# Altium PCB sst_v3.PcbDoc
Units mm, origin at the board's own origin, x right, y up, seen from the top; angles counter-clockwise.
Board outline 75 x 75.5 mm, 2 copper layers (F.Cu, B.Cu); 35 components, 36 nets, 147 pads, 11 vias.
Unrouted connection lines stored in the file: 1.
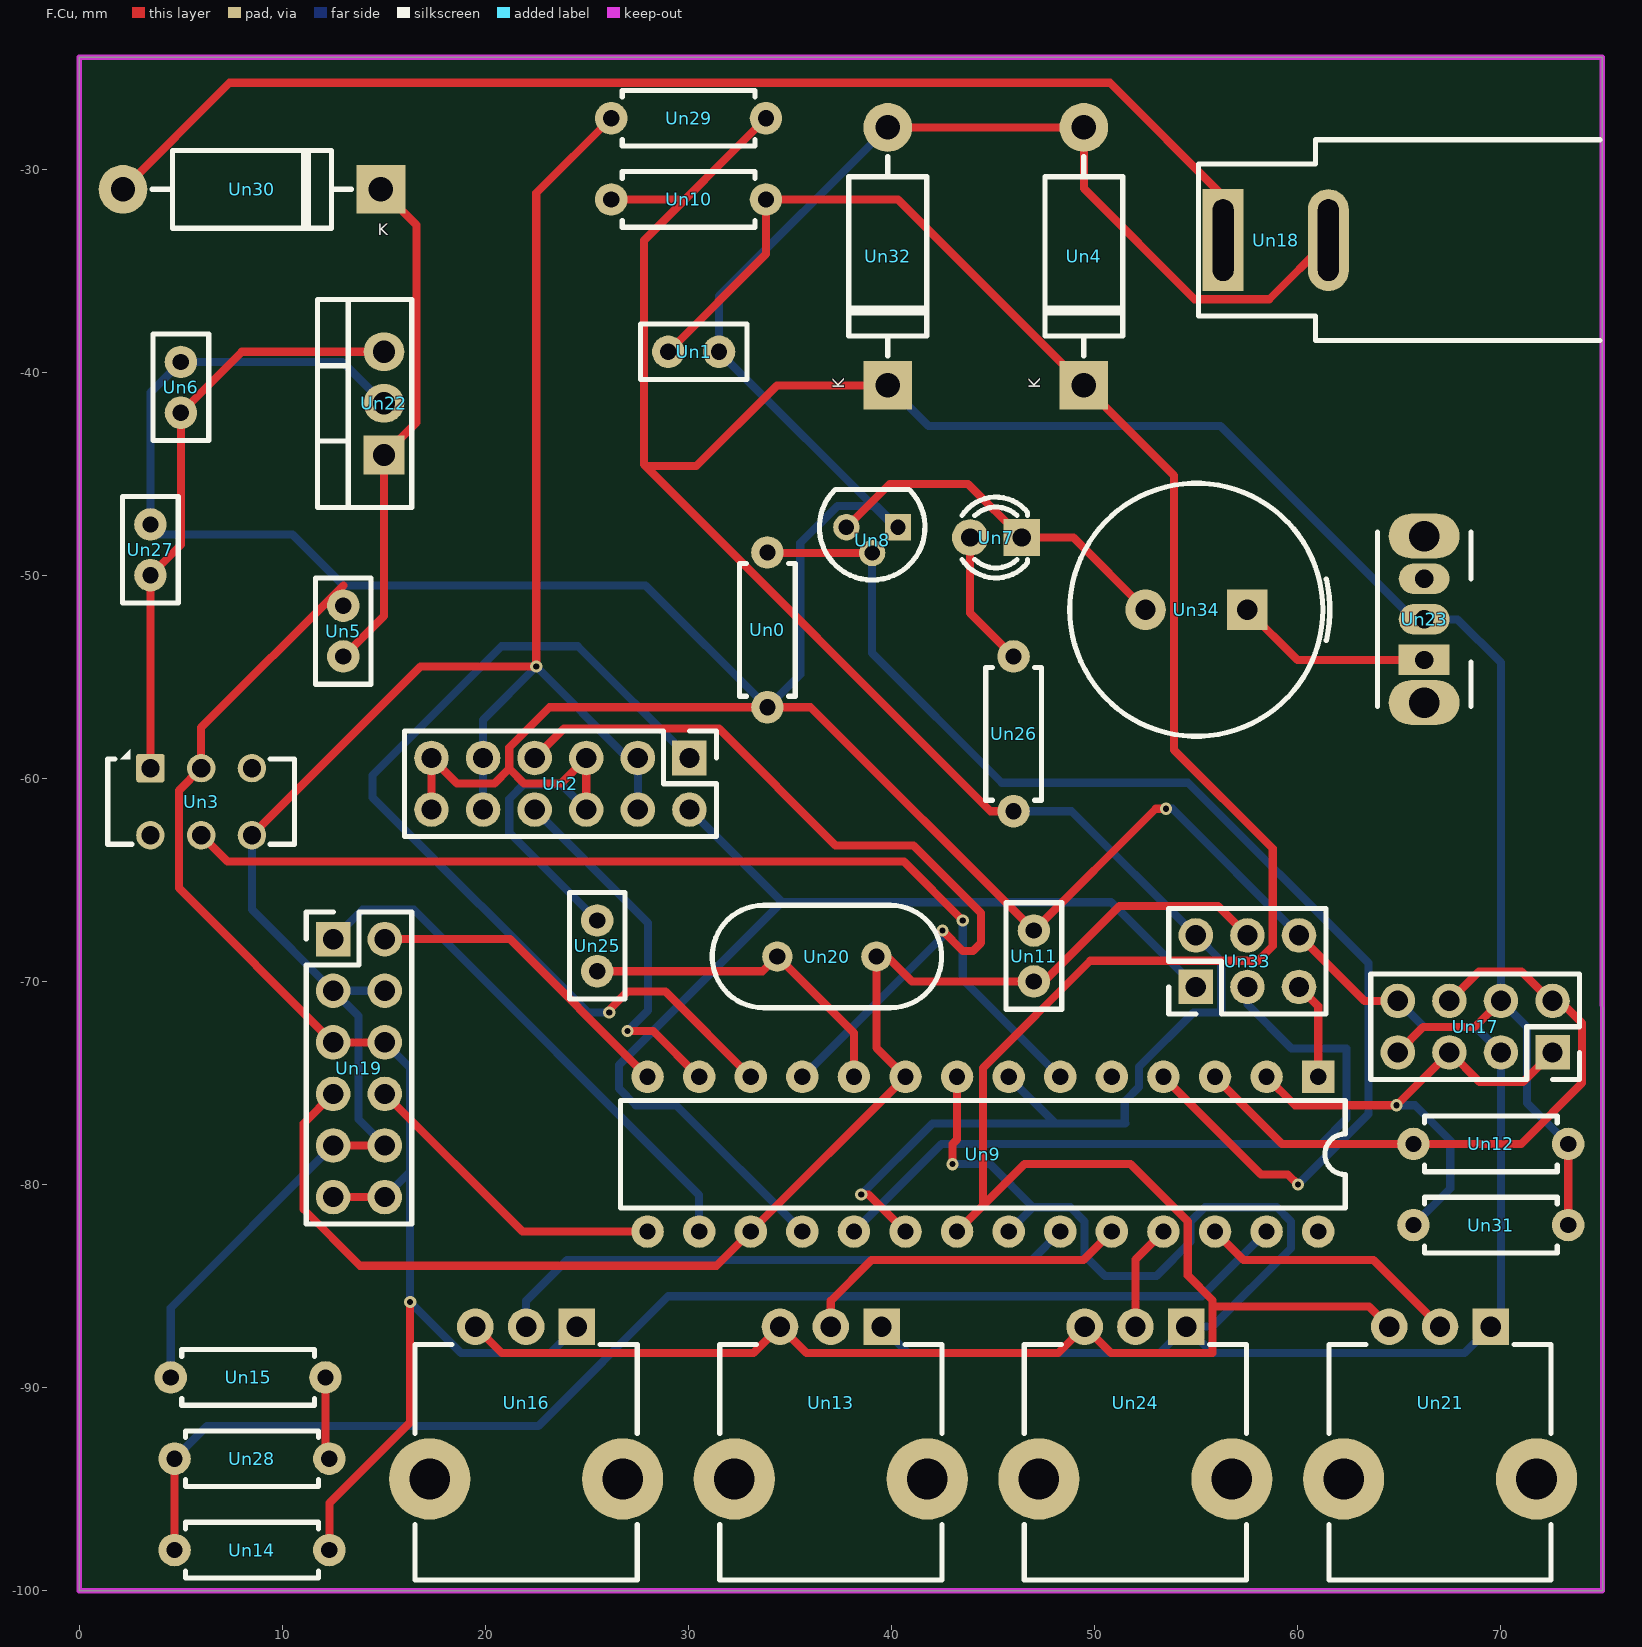
[diagram p0: F.Cu view]
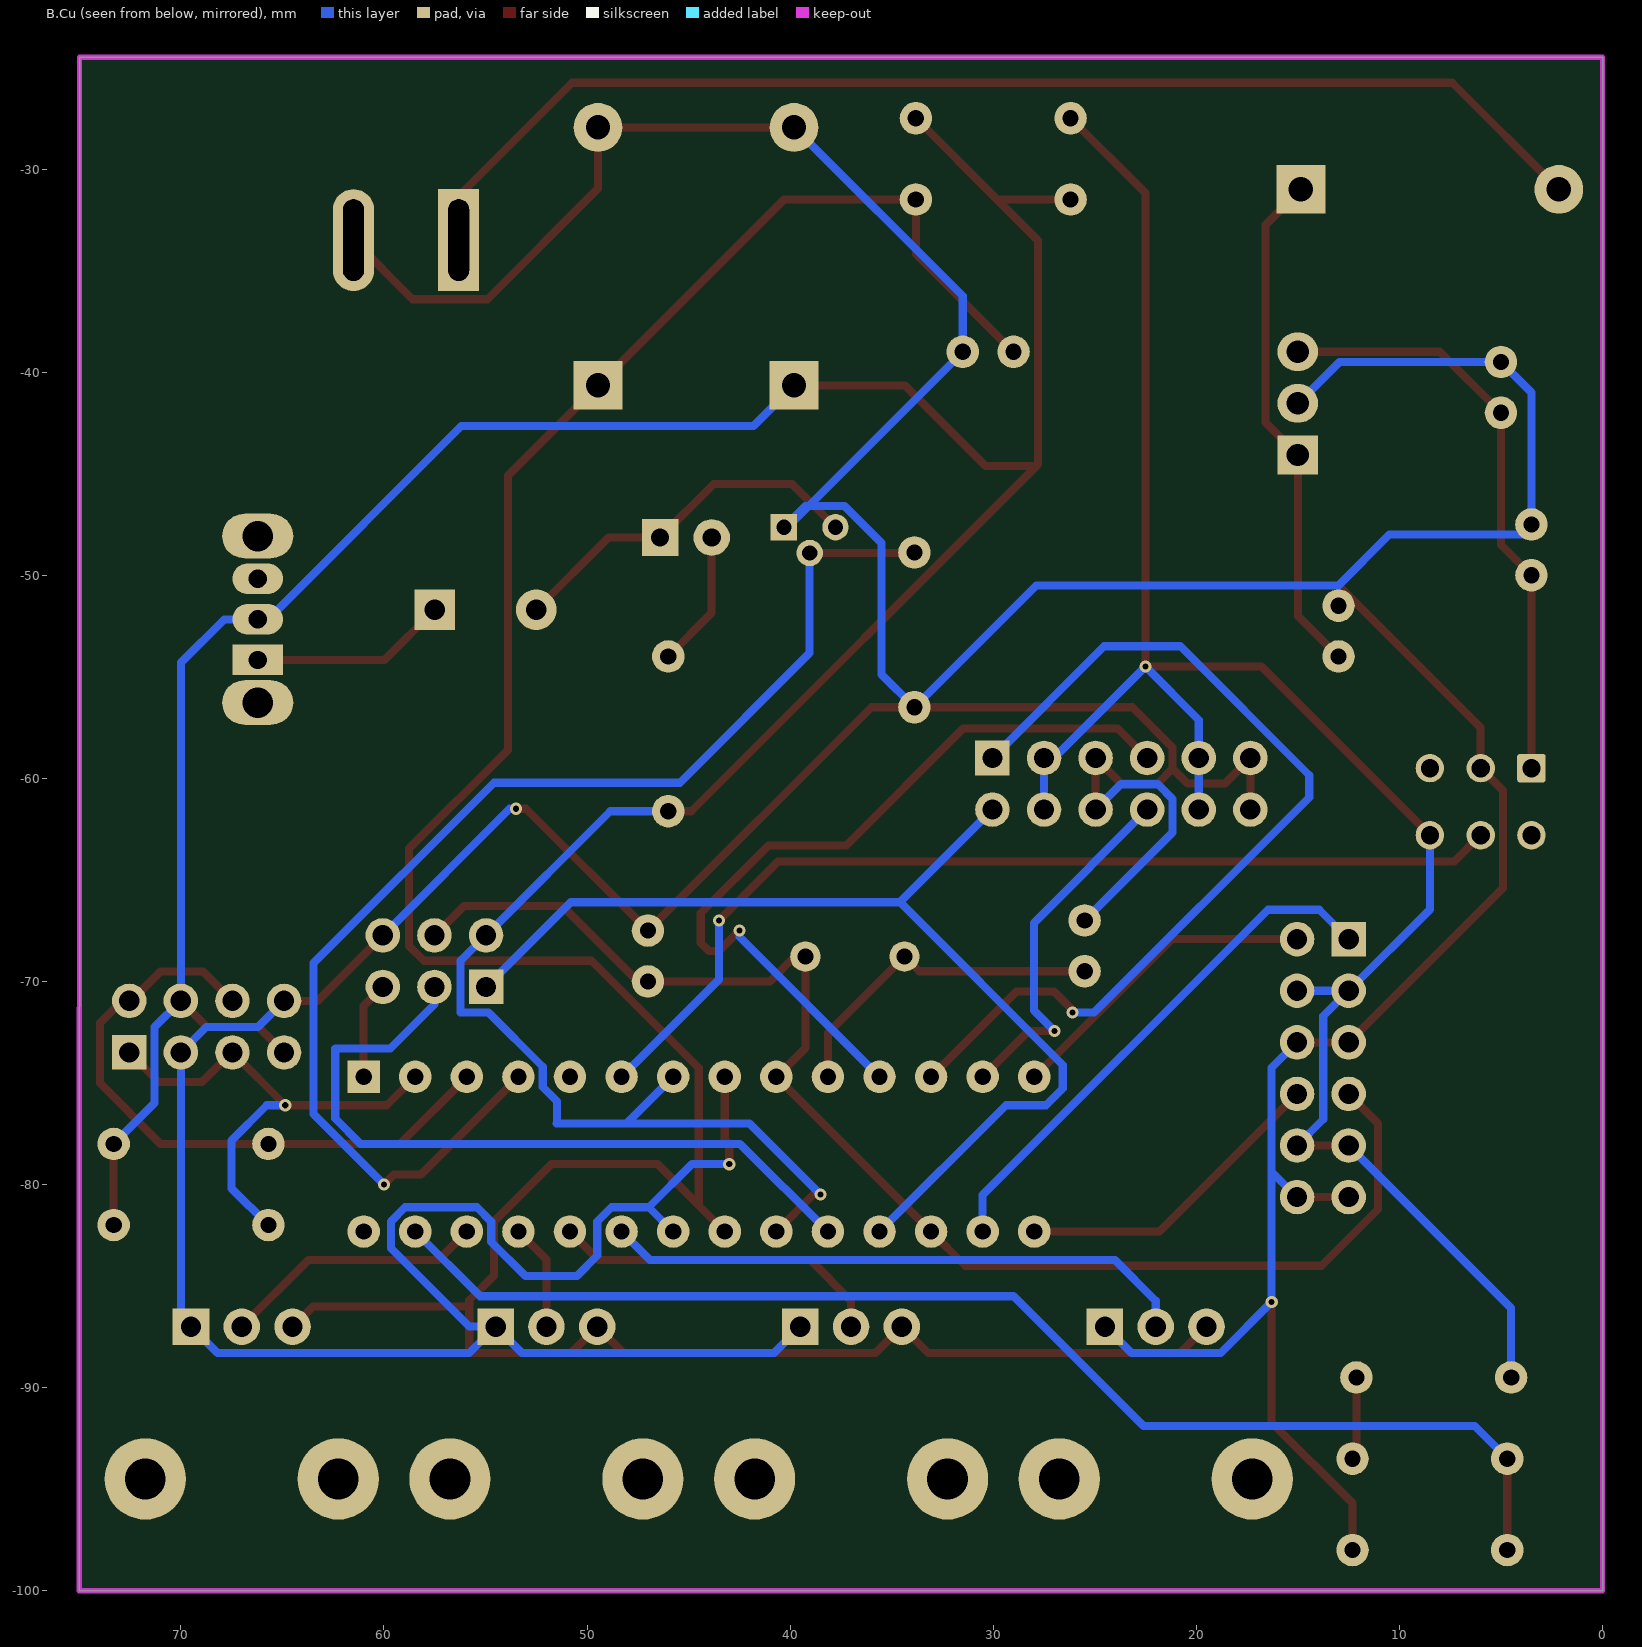
[diagram p1: B.Cu view, seen from below]

## Layer stack, top to bottom
F.Mask: solder mask 0.0102, Solder Resist, Dk 3.5
F.Cu: signal copper 0.0356
Dielectric 1: dielectric 0.32, FR-4, Dk 4.8
B.Cu: signal copper 0.0356
B.Mask: solder mask 0.0102, Solder Resist, Dk 3.5

## Board outline
74.99,-42.5 74.99,-24.5 0,-24.5 0,-99.5 0,-100 75,-100 74.99,-42.5

## Design rules (kind name [scope] priority, off if disabled: settings)
Clearance [All] p1: gap=0.254 ignorepadtopadclearanceinfootprint=FALSE
MinimumSolderMaskSliver [All] p1: minsoldermaskwidth=0
PolygonConnect [All] p1: connectstyle=Direct reliefconductorwidth=0.254 reliefentries=4 polygonreliefangle="90 Angle" airgapwidth=0.254
RoutingVias [All] p1: holewidth=0.711 width=1.27 viastyle="Through Hole" minholewidth=0.711 minwidth=1.27 maxholewidth=0.711 maxwidth=1.27
SilkToSilkClearance [All] p1: silktosilkclearance=0
SilkToSolderMaskClearance [IsPad] p1: minsilkscreentomaskgap=0 clearancetoexposedcopper=TRUE
SolderMaskExpansion [All] p1: expansion=0.102 istentingtop=FALSE
Width [All] p1: maxlimit=10 minlimit=0.254 preferedwidth=0.254 minimp=50.000000 maximp=50.000000 favimp=50.000000
27 further rules are at their usual default settings.

## Components (designator, comment, footprint, x,y, rotation, side; value= is the part's Value field where it differs from the comment)
Un0 "Comment" R_Axial_DIN0207_L6.3mm_D2.5mm_P7.62mm_Horizontal 33.88,-48.88 r270 top value=R
Un1 "Comment" C_Disc_D5.0mm_W2.5mm_P2.50mm 29,-39 r0 top value=C
Un2 "Comment" PinHeader_2x06_P2.54mm_Vertical 30.04,-59 r270 top value=CONN_12
Un3 "Comment" SW_CK_JS202011CQN_DPDT_Straight 3.5,-59.5 r0 top value=~
Un4 "Comment" D_DO-15_P12.70mm_Horizontal 49.46,-40.65 r90 top value=VD
Un5 "Comment" C_Disc_D5.0mm_W2.5mm_P2.50mm 13,-54 r90 top value=C
Un6 "Comment" C_Disc_D5.0mm_W2.5mm_P2.50mm 5,-42 r90 top value=C
Un7 "Comment" LED_D3.0mm 46.404,-48.144 r180 top value=HL_LED
Un8 "Comment" TO-92 40.308,-47.636 r180 top value=2П7240
Un9 "Comment" DIP-28_W7.62mm 61,-74.7 r270 top value=ATmega328-P
Un10 "Comment" R_Axial_DIN0207_L6.3mm_D2.5mm_P7.62mm_Horizontal 26.19,-31.5 r0 top value=R
Un11 "Comment" C_Disc_D5.0mm_W2.5mm_P2.50mm 47,-67.5 r270 top value=C
Un12 "Comment" R_Axial_DIN0207_L6.3mm_D2.5mm_P7.62mm_Horizontal 65.69,-78 r0 top value=R
Un13 "Comment" Potentiometer_TT_P0915N 39.5,-87 r180 top value=R_POT
Un14 "Comment" R_Axial_DIN0207_L6.3mm_D2.5mm_P7.62mm_Horizontal 4.69,-98 r0 top value=R
Un15 "Comment" R_Axial_DIN0207_L6.3mm_D2.5mm_P7.62mm_Horizontal 12.12,-89.5 r180 top value=R
Un16 "Comment" Potentiometer_TT_P0915N 24.5,-87 r180 top value=R_POT
Un17 "Comment" PinSocket_2x04_P2.54mm_Vertical 72.54,-73.5 r270 top value=CONN_8
Un18 "Comment" BarrelJack_SwitchcraftConxall_RAPC10U_Horizontal 56.32,-33.5 r180 top value=CONN_2
Un19 "Comment" PinHeader_2x06_P2.54mm_Vertical 12.5,-67.92 r0 top value=CONN_12
Un20 "Comment" Crystal_HC49-U_Vertical 39.25,-68.775 r180 top value=ZQ_CRYSTAL
Un21 "Comment" Potentiometer_TT_P0915N 69.5,-87 r180 top value=R_POT
Un22 "Comment" TO-220-3_Vertical 15,-44.08 r90 top value=LM7805_TO220
Un23 "Comment" SW_Slide_SPDT_Angled_CK_OS102011MA1Q 66.216,-54.172 r90 top value=SA_SPDT
Un24 "Comment" Potentiometer_TT_P0915N 54.5,-87 r180 top value=R_POT
Un25 "Comment" C_Disc_D5.0mm_W2.5mm_P2.50mm 25.5,-67 r270 top value=C
Un26 "Comment" R_Axial_DIN0207_L6.3mm_D2.5mm_P7.62mm_Horizontal 46,-54 r270 top value=R
Un27 "Comment" C_Disc_D5.0mm_W2.5mm_P2.50mm 3.5,-50 r90 top value=C
Un28 "Comment" R_Axial_DIN0207_L6.3mm_D2.5mm_P7.62mm_Horizontal 4.69,-93.5 r0 top value=R
Un29 "Comment" R_Axial_DIN0207_L6.3mm_D2.5mm_P7.62mm_Horizontal 26.19,-27.5 r0 top value=R
Un30 "Comment" D_DO-15_P12.70mm_Horizontal 14.85,-31 r180 top value=VD_Schottky
Un31 "Comment" R_Axial_DIN0207_L6.3mm_D2.5mm_P7.62mm_Horizontal 65.69,-82 r0 top value=R
Un32 "Comment" D_DO-15_P12.70mm_Horizontal 39.808,-40.65 r90 top value=VD
Un33 "Comment" PinHeader_2x03_P2.54mm_Vertical 54.975,-70.275 r90 top value=CONN_6
Un34 "Comment" Buzzer_TDK_PS1240P02BT_D12.2mm_H6.5mm 57.5,-51.7 r180 top value=Buzzer

## Footprints (in the part's own frame and the unit in brackets; to place one, negate y for a bottom-side part, rotate by r counter-clockwise, add the part's x,y. Pads: shape width x height; smd on the part's side, far side on the other; paste and mask are expansions set on the pad)
BarrelJack_SwitchcraftConxall_RAPC10U_Horizontal [mm]
  rect 2.02x5.02 hole 4.02 slot 1.02 at 0 deg paste-2539.97 mask+0: 1(0,0)
  rrect100% 2.02x5.02 hole 4.02 slot 1.02 at 0 deg paste-2539.97 mask+0: 2(-5.18,0)
  silkscreen extent -18.55,-4.94 1.22,4.94
Buzzer_TDK_PS1240P02BT_D12.2mm_H6.5mm [mm]
  rect 2x2 hole 1 paste-2539.97 mask+0: 1(0,0)
  round 2 hole 1 paste-2539.97 mask+0: 2(5,0)
  silkscreen extent -4.07,-6.23 8.73,6.23
C_Disc_D5.0mm_W2.5mm_P2.50mm [mm]
  round 1.6 hole 0.8 paste-2539.97 mask+0: 1(0,0) 2(2.5,0)
  silkscreen extent -1.37,-1.37 3.87,1.37
Crystal_HC49-U_Vertical [mm]
  round 1.5 hole 0.8 paste-2539.97 mask+0: 1(0,0) 2(4.88,0)
  silkscreen extent -3.21,-2.52 8.09,2.52
D_DO-15_P12.70mm_Horizontal [mm]
  rect 2.4x2.4 hole 1.2 paste-2539.97 mask+0: 1(0,0)
  rrect100% 2.4x2.4 hole 1.2 paste-2539.97 mask+0: 2(12.7,0)
  silkscreen extent 1.44,-1.92 11.26,1.92
DIP-28_W7.62mm [mm]
  rect 1.6x1.6 hole 0.8 paste-2539.97 mask+0: 1(0,0)
  rrect100% 1.6x1.6 hole 0.8 paste-2539.97 mask+0: 2(0,-2.54) 3(0,-5.08) 4(0,-7.62) 5(0,-10.16) 6(0,-12.7) 7(0,-15.24) 8(0,-17.78) 9(0,-20.32) 10(0,-22.86) 11(0,-25.4) 12(0,-27.94) 13(0,-30.48) 14(0,-33.02) 15(7.62,-33.02) 16(7.62,-30.48) 17(7.62,-27.94) 18(7.62,-25.4) 19(7.62,-22.86) 20(7.62,-20.32) 21(7.62,-17.78) 22(7.62,-15.24) 23(7.62,-12.7) 24(7.62,-10.16) 25(7.62,-7.62) 26(7.62,-5.08) 27(7.62,-2.54) 28(7.62,0)
  silkscreen extent 1.16,-34.35 6.46,1.33
LED_D3.0mm [mm]
  rect 1.8x1.8 hole 0.9 paste-2539.97 mask+0: 1(0,0)
  round 1.8 hole 0.9 paste-2539.97 mask+0: 2(2.54,0)
  silkscreen extent -0.29,-1.99 2.94,1.99
PinHeader_2x03_P2.54mm_Vertical [mm]
  rect 1.7x1.7 hole 1 paste-2539.97 mask+0: 1(0,0)
  rrect100% 1.7x1.7 hole 1 paste-2539.97 mask+0: 2(2.54,0) 3(0,-2.54) 4(2.54,-2.54) 5(0,-5.08) 6(2.54,-5.08)
  silkscreen extent -1.33,-6.41 3.87,1.33
PinHeader_2x06_P2.54mm_Vertical [mm]
  rect 1.7x1.7 hole 1 paste-2539.97 mask+0: 1(0,0)
  rrect100% 1.7x1.7 hole 1 paste-2539.97 mask+0: 2(2.54,0) 3(0,-2.54) 4(2.54,-2.54) 5(0,-5.08) 6(2.54,-5.08) 7(0,-7.62) 8(2.54,-7.62) 9(0,-10.16) 10(2.54,-10.16) 11(0,-12.7) 12(2.54,-12.7)
  silkscreen extent -1.33,-14.03 3.87,1.33
PinSocket_2x04_P2.54mm_Vertical [mm]
  rect 1.7x1.7 hole 1 paste-2539.97 mask+0: 1(0,0)
  rrect100% 1.7x1.7 hole 1 paste-2539.97 mask+0: 2(-2.54,0) 3(0,-2.54) 4(-2.54,-2.54) 5(0,-5.08) 6(-2.54,-5.08) 7(0,-7.62) 8(-2.54,-7.62)
  silkscreen extent -3.87,-8.95 1.33,1.33
Potentiometer_TT_P0915N [mm]
  rect 1.8x1.8 hole 1 paste-2539.97 mask+0: 1(0,0)
  round 1.8 hole 1 paste-2539.97 mask+0: 2(2.5,0) 3(5,0)
  rrect100% 4x4 hole 2 paste-2539.97 mask+0: Un1(-2.25,7.5) Un2(7.25,7.5)
  silkscreen extent -2.97,0.88 7.97,12.47
R_Axial_DIN0207_L6.3mm_D2.5mm_P7.62mm_Horizontal [mm]
  round 1.6 hole 0.8 paste-2539.97 mask+0: 1(0,0)
  rrect100% 1.6x1.6 hole 0.8 paste-2539.97 mask+0: 2(7.62,0)
  silkscreen extent 0.54,-1.37 7.08,1.37
SW_CK_JS202011CQN_DPDT_Straight [mm]
  rrect18% 1.4x1.4 hole 0.9 paste-2539.97 mask+0: 1(0,0)
  round 1.4 hole 0.9 paste-2539.97 mask+0: 2(2.5,0) 3(5,0) 4(5,-3.3) 5(2.5,-3.3) 6(0,-3.3)
  silkscreen extent -2.1,-3.75 7.1,0.93
SW_Slide_SPDT_Angled_CK_OS102011MA1Q [mm]
  rect 1.5x2.5 hole 0.9 paste-2539.97 mask+0: 1(0,0)
  rrect100% 1.5x2.5 hole 0.9 paste-2539.97 mask+0: 2(2,0) 3(4,0)
  rrect100% 2.2x3.5 hole 1.5 paste-2539.97 mask+0: Un1(-2.1,0) Un2(6.1,0)
  silkscreen extent -2.3,-2.3 6.3,2.3
TO-92 [mm]
  rect 1.3x1.3 hole 0.75 paste-2539.97 mask+0: 1(0,0)
  round 1.3 hole 0.75 paste-2539.97 mask+0: 2(1.27,1.27) 3(2.54,0)
  silkscreen extent -1.33,-1.85 3.87,2.6
TO-220-3_Vertical [mm]
  rect 1.905x2 hole 1.1 paste-2539.97 mask+0: 1(0,0)
  rrect100% 1.905x2 hole 1.1 paste-2539.97 mask+0: 2(2.54,0) 3(5.08,0)
  silkscreen extent -2.58,-1.37 7.66,3.27

## Part data
Un0 Un10 Un12 Un14 Un15 Un26 Un28 Un29 Un31: library part R_Axial_DIN0207_L6.3mm_D2.5mm_P7.62mm_Horizontal, "Resistor, Axial_DIN0207 series, Axial, Horizontal, pin pitch=7.62mm, 0.25W = 1/4W, length*diameter=6.3*2.5mm^2, http://cdn-reichelt.de/documents/datenblatt/B400/1_4W%23YAG.pdf", Footprint=Resistor_THT:R_Axial_DIN0207_L6.3mm_D2.5mm_P7.62mm_Horizontal, ki_fp_filters=Resistor_*:*
  Un0: Reference=R13
  Un10: Reference=R2
  Un12: Reference=R4
  Un14: Reference=R11, Description=10кОм
  Un15: Reference=R9, Description=10кОм
  Un26: Reference=R12
  Un28: Reference=R10, Description=10кОм
  Un29: Reference=R1
  Un31: Reference=R3
Un1 Un5 Un6 Un11 Un25 Un27: library part C_Disc_D5.0mm_W2.5mm_P2.50mm, "C, Disc series, Radial, pin pitch=2.50mm, , diameter*width=5*2.5mm^2, Capacitor, http://cdn-reichelt.de/documents/datenblatt/B300/DS_KERKO_TC.pdf"
  Un1: Reference=C1, Footprint=Capacitor_THT:CP_Radial_D8.0mm_P2.50mm
  Un5: Reference=C2, Footprint=Capacitor_THT:CP_Radial_D8.0mm_P3.50mm
  Un6: Reference=C4, Footprint=Capacitor_THT:CP_Radial_D8.0mm_P2.50mm
  Un11: Reference=C5, Footprint=Capacitor_THT:C_Radial_D6.3mm_H5.0mm_P2.50mm, Description=22пФ
  Un25: Reference=C6, Footprint=Capacitor_THT:C_Radial_D6.3mm_H5.0mm_P2.50mm, Description=22пФ
  Un27: Reference=C3, Footprint=Capacitor_THT:CP_Radial_D5.0mm_P2.00mm
Un2 Un19: library part PinHeader_2x06_P2.54mm_Vertical, "Through hole straight pin header, 2x06, 2.54mm pitch, double rows", Footprint=Connector_PinHeader_2.54mm:PinHeader_2x06_P2.54mm_Vertical, Description=1, PIN2=2, PIN3=3, PIN4=4, PIN5=5, PIN6=6, PIN7=7, PIN8=8, PIN9=9, PIN10=10, PIN11=11, PIN12=12, ki_fp_filters=Connector*:*
  Un2: Reference=XS2
  Un19: Reference=XS5
Un3: library part SW_CK_JS202011CQN_DPDT_Straight, "C&K sub miniature slide switch, JS series, DPDT, right angle, http://www.ckswitches.com/media/1422/js.pdf", Reference=SA1, Footprint=Button_Switch_THT:SW_CK_JS202011CQN_DPDT_Straight
Un4 Un30 Un32: library part D_DO-15_P12.70mm_Horizontal, "Diode, DO-15 series, Axial, Horizontal, pin pitch=12.7mm, , length*diameter=7.6*3.6mm^2, , http://www.diodes.com/_files/packages/DO-15.pdf", Footprint=Diode_THT:D_5KPW_P12.70mm_Horizontal
  Un4: Reference=VD1
  Un30: Reference=VD3
  Un32: Reference=VD2
Un7: library part LED_D3.0mm, "LED, diameter 3.0mm, 2 pins", Reference=HL1, Footprint=LED_THT:LED_D3.0mm, ki_fp_filters=LED_*:*
Un8: library part TO-92, "TO-92 leads molded, narrow, drill 0.75mm (see NXP sot054_po.pdf)", Reference=VT1, Footprint=Package_TO_SOT_THT:TO-92, Datasheet=http://www.vzpp-s.ru/production/catalog.pdf, Description=2NMOS
Un9: library part DIP-28_W7.62mm, "28-lead though-hole mounted DIP package, row spacing 7.62 mm (300 mils)", Reference=DD1, Footprint=Package_DIP:DIP-28_W7.62mm, Datasheet=http://ww1.microchip.com/downloads/en/DeviceDoc/ATmega328_P%20AVR%20MCU%20with%20picoPower%20Technology%20Data%20Sheet%2040001984A.pdf, Description="20MHz, 32kB Flash, 2kB SRAM, 1kB EEPROM, DIP-28", ki_fp_filters=DIP*W7.62mm*
Un13 Un16 Un21 Un24: library part Potentiometer_TT_P0915N, "http://www.ttelectronics.com/sites/default/files/download-files/Datasheet_PanelPot_P09xSeries.pdf", Footprint=Potentiometer_THT:Potentiometer_TT_P0915N, Description=10кОм, ki_fp_filters=Potentiometer_*:*
  Un13: Reference=R7
  Un16: Reference=R8
  Un21: Reference=R5
  Un24: Reference=R6
Un17: library part PinSocket_2x04_P2.54mm_Vertical, "Through hole straight socket strip, 2x04, 2.54mm pitch, double cols (from Kicad 4.0.7), script generated", Reference=XS3, Footprint=Connector_PinSocket_2.54mm:PinSocket_2x04_P2.54mm_Vertical, Description=1, PIN2=2, PIN3=3, PIN4=4, PIN5=5, PIN6=6, PIN7=7, PIN8=8, ki_fp_filters=Connector*:*
Un18: library part BarrelJack_SwitchcraftConxall_RAPC10U_Horizontal, "DC Power Jack, 13A, 24V, Panel Mount,Through-hole, https://www.switchcraft.com/Drawings/RAPC10U_CD.pdf", Reference=XS1, Footprint=Connector_BarrelJack:BarrelJack_SwitchcraftConxall_RAPC10U_Horizontal, Description=1, PIN2=2, ki_fp_filters=Connector*:*
Un20: library part Crystal_HC49-U_Vertical, "Crystal THT HC-49/U http://5hertz.com/pdfs/04404_D.pdf", Reference=ZQ1, Footprint=Crystal:Crystal_HC49-U_Vertical, Description=16МГЦ, ki_fp_filters="Crystal_* Resonator*"
Un22: library part TO-220-3_Vertical, "TO-220-3, Vertical, RM 2.54mm, see https://www.vishay.com/docs/66542/to-220-1.pdf", Reference=DA1, Footprint=Package_TO_SOT_THT:TO-220-3_Vertical, Datasheet=https://www.onsemi.cn/PowerSolutions/document/MC7800-D.PDF, Description="Positive 1A 35V Linear Regulator, Fixed Output 5V, TO-220", ki_fp_filters=TO?220*
Un23: library part SW_Slide_SPDT_Angled_CK_OS102011MA1Q, "CuK miniature slide switch, OS series, SPDT, right angle, http://www.ckswitches.com/media/1428/os.pdf", Reference=SA2, Footprint=Button_Switch_THT:SW_Slide_SPDT_Angled_CK_OS102011MA1Q, ki_fp_filters="SW_*_SPDT* SW_SPDT*"
Un33: library part PinHeader_2x03_P2.54mm_Vertical, "Through hole straight pin header, 2x03, 2.54mm pitch, double rows", Reference=XS4, Footprint=Connector_PinHeader_2.54mm:PinHeader_2x03_P2.54mm_Vertical, Description=1, PIN2=2, PIN3=3, PIN4=4, PIN5=5, PIN6=6, ki_fp_filters=Connector*:*
Un34: library part Buzzer_TDK_PS1240P02BT_D12.2mm_H6.5mm, "Buzzer, D12.2mm height 6.5mm, https://product.tdk.com/info/en/catalog/datasheets/piezoelectronic_buzzer_ps_en.pdf", Reference=HA1, Footprint=Buzzer_Beeper:Buzzer_TDK_PS1240P02BT_D12.2mm_H6.5mm, Description="Buzzer, polarized", ki_fp_filters=*Buzzer*

## Via types
v1: diameter 0.6, hole 0.3, F.Cu to B.Cu, tented both sides, 11 vias

## Nets (pads, with @x,y where several pads share a name; then routed paths per layer and width w, separated by ;. In a path a pad name is that pad's centre, name@x,y a point inside that pad or via, vN(x,y) a via of type N, cw(c..) or ccw(c..) an arc to the next point about the centre after c; other vN are vias at no path point)
+2V5: Un1.1 Un4.1 Un9.21 Un10.2 Un13.3 Un16.3 Un21.3 Un24.3 | length 154.7
  F.Cu w0.4: Un16.3 20.8,-88.3 33.2,-88.3 Un13.3 35.8,-88.3 48.2,-88.3 Un24.3 50.8,-88.3 55.8,-88.3 55.8,-86 ; Un1.1 33.81,-34.19 Un10.2 40.31,-31.5 Un4.1 53.9,-45.09 53.9,-58.6 58.765,-63.465 58.765,-68.253 58.033,-68.985 49.778,-68.985 44.5,-74.263 44.5,-81.04 Un9.21 46.54,-79 51.757,-79 54.58,-81.823 54.58,-84.48 55.8,-85.7 55.8,-86 ; Un21.3 63.5,-86 55.8,-86
+5V: Un9.7 Un9.20 Un10.1 Un12.2 Un17.4 Un17.7 Un23.2 Un26.2 Un29.2 Un31.2 Un32.1 Un33.2 | length 183.4
  F.Cu w0.4: Un10.1 29.81,-31.5 Un29.2 27.8,-33.51 27.8,-44.551 27.874,-44.626 ; v1(38.5,-80.5) 38.86,-80.5 Un9.20 ; Un32.1 34.35,-40.65 30.374,-44.626 27.874,-44.626 ; Un26.2 44.869,-61.62 27.874,-44.626 ; Un17.7 66.17,-72.25 68.71,-72.25 Un17.4 ; Un31.2 Un12.2
  B.Cu w0.4: v1(38.5,-80.5) 42,-77 48.06,-77 ; Un32.1 41.808,-42.65 56.194,-42.65 65.716,-52.172 Un23.2 67.866,-52.172 70,-54.306 Un17.4 71.29,-72.25 71.29,-75.98 Un12.2 ; Un9.7 48.06,-77 ; Un26.2 48.86,-61.62 Un33.2 56.225,-68.985 56.225,-71.525 54.858,-71.525 52.18,-74.203 52.18,-75.197 51.477,-75.9 51.477,-76.977 51.5,-77 48.06,-77
+BATT: Un2.3 Un2.4 Un2.9 Un2.10 Un3.4 Un15.2 Un19.3 Un19.4 Un19.9 Un19.10 Un29.1 | length 101.3
  F.Cu w0.4: Un3.4 16.8,-54.5 v1(22.5,-54.5) 22.5,-31.19 Un29.1 ; Un19.9 Un19.10
  B.Cu w0.4: Un15.2 4.5,-86.08 Un19.9 ; Un3.4 8.5,-66.46 Un19.3 ; Un19.10 13.75,-76.79 13.75,-71.71 Un19.3 ; Un19.4 Un19.3 ; Un2.10 Un2.9 19.88,-57.12 v1(22.5,-54.5) 27,-59 Un2.3 Un2.4
GND: Un0.2 Un1.2 Un2.5 Un2.6 Un2.11 Un2.12 Un3.2 Un4.2 Un5.2 Un6.2 Un8.1 Un9.8 Un9.22 Un11.1 Un13.1 Un14.2 Un16.1 Un17.3 Un17.8 Un18.2 Un19.5 Un19.6 Un19.11 Un19.12 Un21.1 Un22.2 Un24.1 Un25.1 Un27.2 Un32.2 Un33.6 | length 368.1
  F.Cu w0.4: Un14.2 12.31,-95.69 16.29,-91.71 v1(16.29,-85.79) ; Un19.11 Un19.12 ; 13,-50.5 6,-57.5 Un3.2 4.9,-60.6 4.9,-65.4 Un19.5 Un19.6 ; Un2.12 Un2.11 18.59,-60.25 20.438,-60.25 21.17,-59.518 ; Un2.6 Un2.5 23.71,-60.25 21.902,-60.25 21.17,-59.518 ; Un32.2 Un4.2 49.46,-30.96 54.91,-36.41 58.59,-36.41 Un18.2 ; v1(43,-79) 43,-78 43.22,-77.78 Un9.8 ; v1(53.5,-61.5) 53,-61.5 Un11.1 36,-56.5 Un0.2 23.152,-56.5 21.17,-58.482 21.17,-59.518 ; Un33.6 63.28,-70.96 Un17.8
  B.Cu w0.4: Un22.2 12.96,-39.5 Un6.2 3.5,-41 3.5,-48 10.5,-48 13,-50.5 27.88,-50.5 Un0.2 35.5,-54.88 35.5,-48.419 37.333,-46.586 39.258,-46.586 Un8.1 40.136,-47.636 Un1.2 31.5,-36.258 Un32.2 ; Un19.12 16.29,-79.37 ; Un19.6 16.29,-74.25 16.29,-79.37 ; Un16.1 23.2,-88.3 18.8,-88.3 v1(16.29,-85.79) 16.29,-79.37 ; Un2.6 23.71,-60.29 21.902,-60.29 21.17,-61.022 21.17,-62.67 Un25.1 ; Un13.1 40.8,-88.3 53.2,-88.3 Un24.1 ; v1(43,-79) 44.84,-79 46.96,-81.12 ; Un9.22 46.96,-81.12 ; v1(53.5,-61.5) 53.82,-61.5 Un33.6 ; Un17.8 66.21,-72.25 68.75,-72.25 Un17.3 70,-86.5 Un21.1 68.2,-88.3 55.8,-88.3 Un24.1 ; 46.96,-81.12 48.797,-81.12 49.5,-81.823 49.5,-83.5 50.5,-84.5 53.037,-84.5 54.72,-82.817 54.72,-81.823 55.423,-81.12 58.957,-81.12 59.66,-81.823 59.66,-83.14 55.8,-87 Un24.1
Net-(DA1-IN): Un5.1 Un22.1 Un30.1 | length 25.2
  F.Cu w0.4: Un5.1 15,-52 Un22.1 16.6,-42.48 16.6,-32.75 Un30.1
Net-(DA1-OUT): Un3.1 Un6.1 Un22.3 Un27.1 | length 29.4
  F.Cu w0.4: Un3.1 Un27.1 5,-48.5 Un6.1 8,-39 Un22.3
Net-(DD1-EPB5): Un9.19 Un33.3 | length 36.7
  B.Cu w0.4: Un9.19 42.46,-78 61.151,-78 62.4,-76.751 62.4,-73.3 59.69,-73.3 57.515,-71.125 Un33.3
Net-(DD1-PB0): Un9.14 Un19.2 | length 15.7
  F.Cu w0.4: Un19.2 21.2,-67.92 Un9.14
Net-(DD1-PB1): Un9.15 Un19.8 | length 15.7
  F.Cu w0.4: Un19.8 21.82,-82.32 Un9.15
Net-(DD1-PB2): Un9.16 Un19.1 | length 26.2
  B.Cu w0.4: Un19.1 13.95,-66.47 16.47,-66.47 30.52,-80.52 Un9.16
Net-(DD1-PB3): Un9.9 Un9.17 Un11.2 Un19.7 Un20.1 Un33.4 | length 68.3
  F.Cu w0.4: Un19.7 11.05,-76.99 11.05,-81.221 13.829,-84 31.38,-84 Un9.17 Un9.9 39.25,-73.27 Un20.1 39.775,-68.775 41,-70 Un11.2 47.5,-70 51.215,-66.285 56.065,-66.285 Un33.4
Net-(DD1-PB4): Un2.2 Un9.18 Un33.1 | length 53.4
  B.Cu w0.4: Un2.2 34.6,-66.1 ; Un9.18 29.38,-76.1 27.4,-76.1 26.58,-75.28 26.58,-74.12 34.6,-66.1 ; Un33.1 50.8,-66.1 35,-66.1 ; 34.6,-66.1 35,-66.1 ; 34.6,-66.1 35,-66.1
Net-(DD1-PC0): Un9.23 Un16.2 | length 29
  B.Cu w0.4: Un16.2 22,-85.727 24.007,-83.72 46.9,-83.72 Un9.23
Net-(DD1-PC1): Un9.24 Un13.2 | length 16.5
  F.Cu w0.4: Un13.2 37,-85.727 39.007,-83.72 49.44,-83.72 Un9.24
Net-(DD1-PC2): Un9.25 Un24.2 | length 5.3
  F.Cu w0.4: Un24.2 52,-83.7 Un9.25
Net-(DD1-PC3): Un9.26 Un21.2 | length 13
  F.Cu w0.4: Un9.26 57.32,-83.72 63.72,-83.72 Un21.2
Net-(DD1-PC4): Un9.27 Un14.1 Un28.1 | length 62.9
  F.Cu w0.4: Un14.1 Un28.1
  B.Cu w0.4: Un28.1 6.29,-91.9 22.6,-91.9 29,-85.5 55.28,-85.5 Un9.27
Net-(DD1-PD0): Un9.2 Un17.1 Un17.5 Un31.1 | length 25.2
  F.Cu w0.4: Un9.2 59.86,-76.1 v1(64.86,-76.1) Un17.5 67.5,-73.5 68.95,-74.95 71.09,-74.95 Un17.1
  B.Cu w0.4: v1(64.86,-76.1) 65.77,-76.1 67.5,-77.83 67.5,-80.19 Un31.1
Net-(DD1-PD1): Un9.3 Un12.1 Un17.2 Un17.6 | length 31.8
  F.Cu w0.4: Un9.3 59.22,-78 Un12.1 71,-78 73.99,-75.01 73.99,-72.05 72.9,-70.96 Un17.2 72.46,-70.96 71.01,-69.51 68.91,-69.51 Un17.6
Net-(DD1-PD2): Un0.1 Un8.2 Un9.4 | length 62
  F.Cu w0.4: Un0.1 33.906,-48.906 Un8.2 ; Un9.4 58.18,-79.5 59.5,-79.5 v1(60,-80)
  B.Cu w0.4: Un8.2 39.038,-53.838 45.42,-60.22 54.591,-60.22 63.47,-69.099 63.47,-76.53 v1(60,-80)
Net-(DD1-PD4): Un3.5 Un9.6 | length 48.9
  F.Cu w0.4: Un3.5 7.3,-64.1 40.6,-64.1 v1(43.5,-67)
  B.Cu w0.4: v1(43.5,-67) 43.5,-69.9 Un9.6
Net-(DD1-PD5): Un2.7 Un9.11 | length 40.4
  F.Cu w0.4: Un2.7 23.87,-57.55 31.49,-57.55 37.24,-63.3 41.073,-63.3 44.4,-66.627 44.4,-68.1 44,-68.5 43.5,-68.5 v1(42.5,-67.5)
  B.Cu w0.4: Un9.11 42.5,-67.8 v1(42.5,-67.5)
Net-(DD1-PD6): Un2.1 Un9.12 | length 46.9
  F.Cu w0.4: v1(26.091,-71.538) 26.091,-71.409 27,-70.5 28.86,-70.5 Un9.12
  B.Cu w0.4: v1(26.091,-71.538) 25.038,-71.538 14.439,-60.939 14.439,-59.85 20.789,-53.5 24.54,-53.5 Un2.1
Net-(DD1-PD7): Un2.8 Un9.13 | length 18.1
  F.Cu w0.4: v1(26.99,-72.437) 28.257,-72.437 Un9.13
  B.Cu w0.4: Un2.8 28,-67.12 28,-71.427 v1(26.99,-72.437)
Net-(DD1-XTAL2{slash}PB7): Un9.10 Un20.2 Un25.2 | length 16.7
  F.Cu w0.4: Un25.2 33.645,-69.5 Un20.2 38.14,-72.545 Un9.10
Net-(DD1-{\R\E\S\E\T\}\{\s\l\a\s\h\}\P\C\6\)\: Un9.1 Un33.5 | length 4.8
  F.Cu w0.4: Un33.5 61,-71.22 Un9.1
Net-(HA1-+): Un23.1 Un34.1 | length 9.7
  F.Cu w0.4: Un34.1 59.972,-54.172 Un23.1
Net-(HA1--): Un7.1 Un8.3 Un34.2 | length 18.2
  F.Cu w0.4: Un8.3 39.904,-45.5 43.76,-45.5 Un7.1 48.944,-48.144 Un34.2
Net-(HL1-A): Un7.2 Un26.1 | length 6.7
  F.Cu w0.4: Un7.2 43.864,-51.864 Un26.1
Net-(R10-Pad2): Un15.1 Un28.2 | length 4.1
  F.Cu w0.4: Un15.1 12.12,-93.31 Un28.2
Net-(VD3-A): Un18.1 Un30.2 | length 60.8
  F.Cu w0.4: Un30.2 7.4,-25.75 50.75,-25.75 56.32,-31.32 Un18.1
unconnected-(DD1-PC5-Pad28): Un9.28
unconnected-(DD1-PD3-Pad5): Un9.5
unconnected-(SA1-Pad3): Un3.3
unconnected-(SA1-Pad6): Un3.6
unconnected-(SA2-Pad3): Un23.3
pads on no net: Un13.Un1 Un13.Un2 Un16.Un1 Un16.Un2 Un21.Un1 Un21.Un2 Un23.Un1 Un23.Un2 Un24.Un1 Un24.Un2

## Keep-outs
Edge.Cuts:
  lines w0: 0,-100 75,-100 74.99,-42.5 74.99,-24.5 0,-24.5 0,-99.5 0,-100
  lines w0.254: 0,-100 75,-100 74.99,-42.5 74.99,-24.5 0,-24.5 0,-99.5 0,-100

## Text inside footprints (layer, text, board x,y; h text height)
Un4: F.Fab "K" at 47.523,-40.807 h1 r90; F.SilkS "K" at 47.523,-40.807 h1 r90
Un30: F.Fab "K" at 14.693,-33.463 h1; F.SilkS "K" at 14.693,-33.463 h1
Un32: F.Fab "K" at 37.871,-40.807 h1 r90; F.SilkS "K" at 37.871,-40.807 h1 r90